# Altium PCB TurboSpin.PcbDoc (part 2 of 3)
Units mm, origin at the board's own origin, x right, y up, seen from the top; angles counter-clockwise.
Board outline 70.29 x 70.31 mm, 4 copper layers (Top Layer, GND, Power, Bottom Layer), stack 0.603 mm thick; 151 components, 101 nets, 536 pads, 784 vias.
Unrouted connection lines stored in the file: 8.
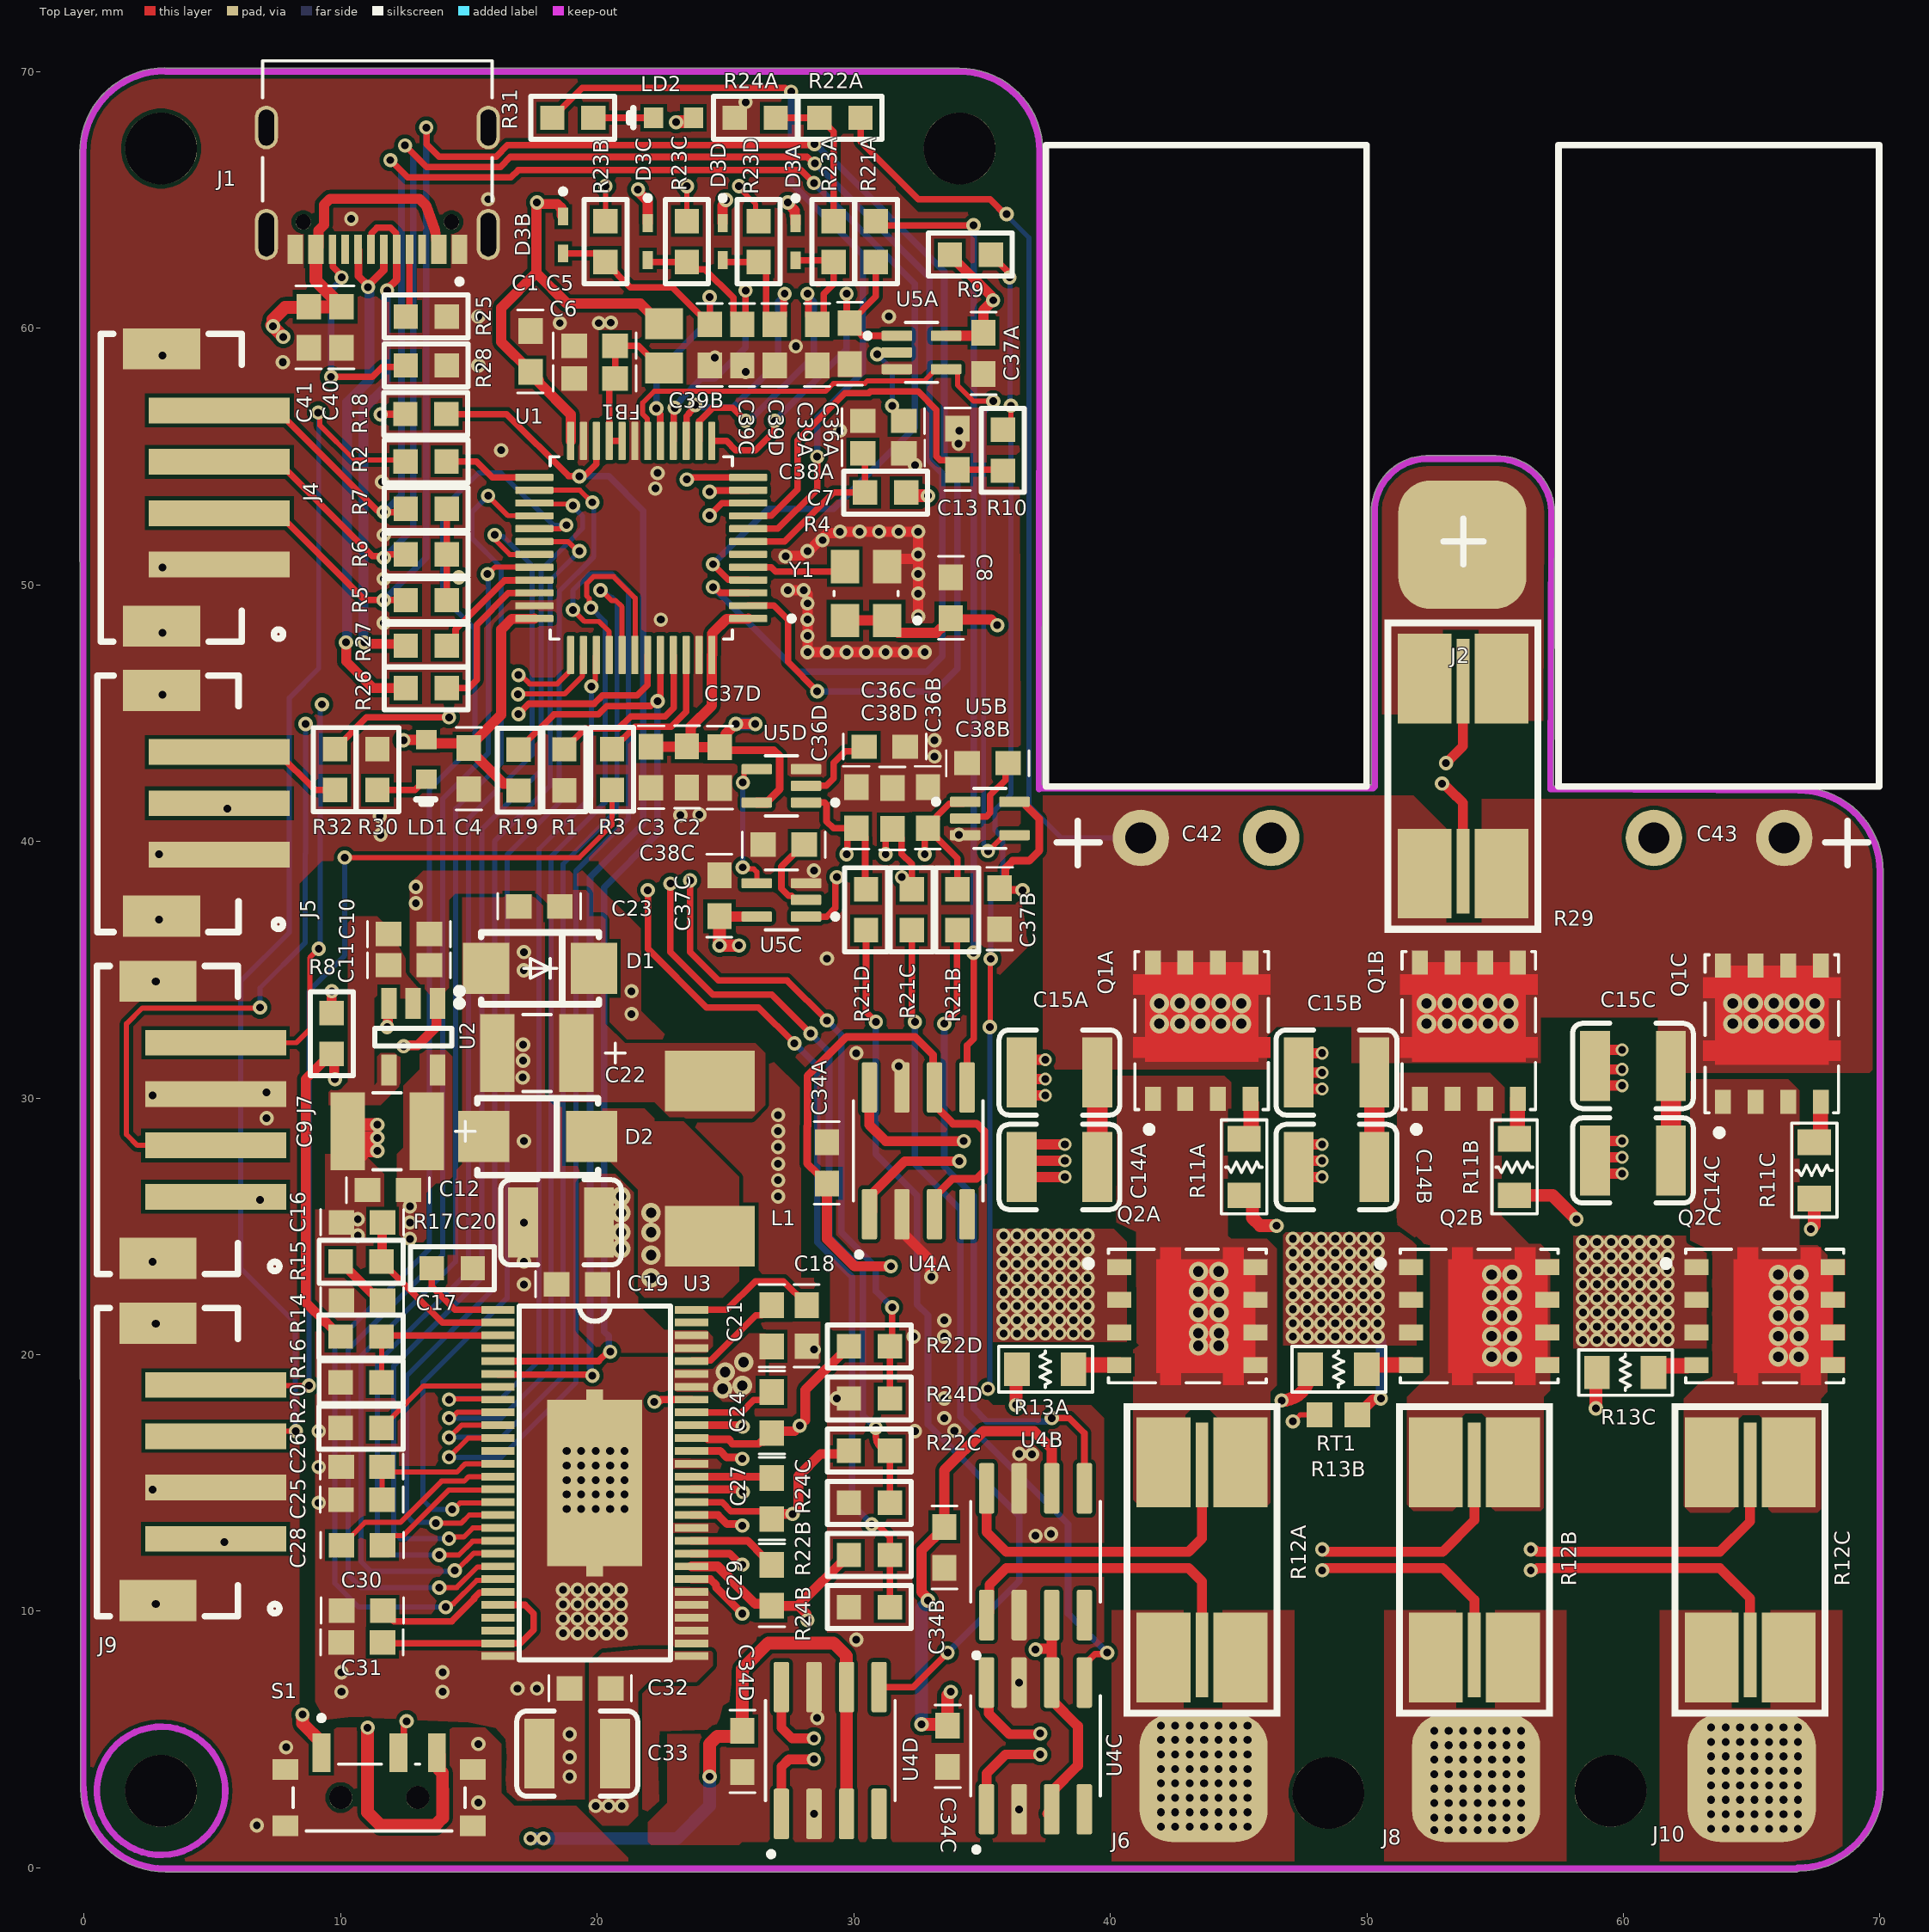
[diagram p0: Top Layer view]

## Via types
v1: diameter 0.559, hole 0.305, Top Layer to Bottom Layer, tented both sides, 440 vias
v2: diameter 0.56, hole 0.3, Top Layer to Bottom Layer, tented both sides, 254 vias
v3: diameter 0.762, hole 0.406, Top Layer to Bottom Layer, tented both sides, 72 vias
v4: diameter 0.508, hole 0.305, Top Layer to Bottom Layer, tented both sides, 18 vias

## Nets (pads, with @x,y where several pads share a name; then routed paths per layer and width w, separated by ;. In a path a pad name is that pad's centre, name@x,y a point inside that pad or via, vN(x,y) a via of type N, cw(c..) or ccw(c..) an arc to the next point about the centre after c; other vN are vias at no path point) (continued)
GND: (continued)
  other v2: 6.731,1.651 28.448,2.102 36.446,2.281 15.367,2.54 7.874,4.699 15.367,4.826 28.575,5.842 13.97,6.858 36.446,7.221 13.97,7.62 30.099,8.89 32.385,17.018 29.337,18.288 28.448,20.193 32.334,20.701 10.668,24.638 10.668,25.273 27.052,26.162 27.052,26.797 27.052,27.432 27.052,28.087 27.052,28.707 7.112,29.21 7.112,30.226 17.093,30.799 17.108,31.455 30.099,31.75 17.108,32.081 21.336,33.274 21.336,34.163 17.136,34.974 17.145,35.687 28.448,38.862 11.557,40.259 34.096,40.259 11.524,40.987 23.241,41.021 23.983,41.039 11.684,48.514 11.679,50.235 28.194,51.308 11.684,51.943 11.617,54.007 32.387,54.661 34.087,55.499 34.112,56.007 25.781,58.293 24.589,58.85 18.542,60.198 20.066,60.198 20.532,60.216 15.367,60.452 10.414,64.262 15.748,65.024 25.781,68.806

## Text inside footprints (layer, text, board x,y; h text height)
J1: Mechanical 13 "PCB EDGE" at 6.23,69.718 h1 r180